# Altium PCB ExpandBoard-103-003.PcbDoc
Units mm, origin at the board's own origin, x right, y up, seen from the top; angles counter-clockwise.
Board outline 69 x 68 mm, 2 copper layers (Top Layer, Bottom Layer), stack 0.325 mm thick; 28 components, 20 nets, 53 pads, 0 vias.
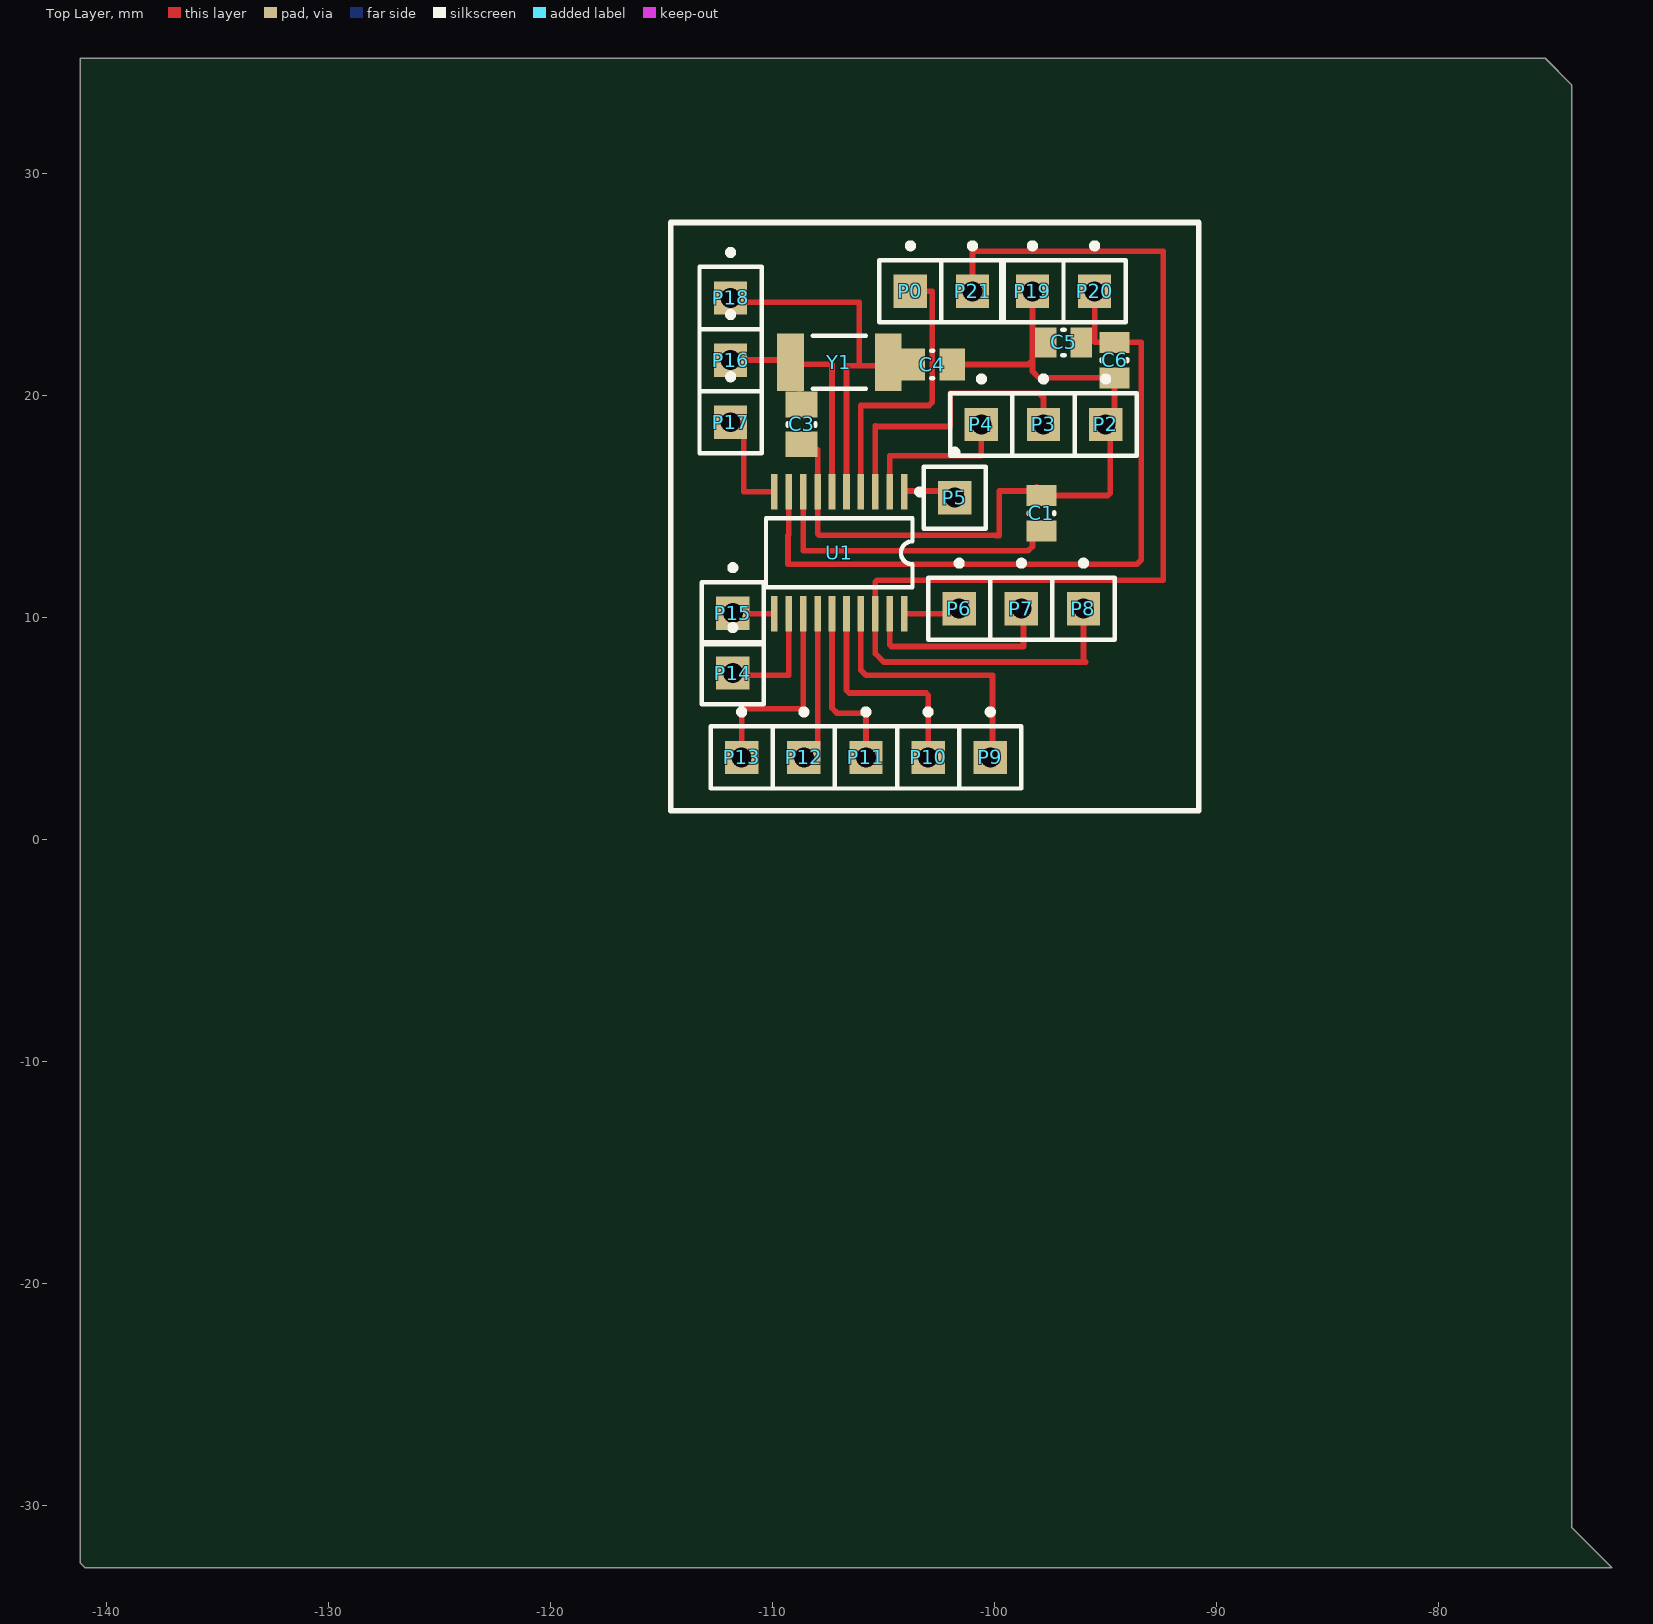
[diagram p0: Top Layer view]
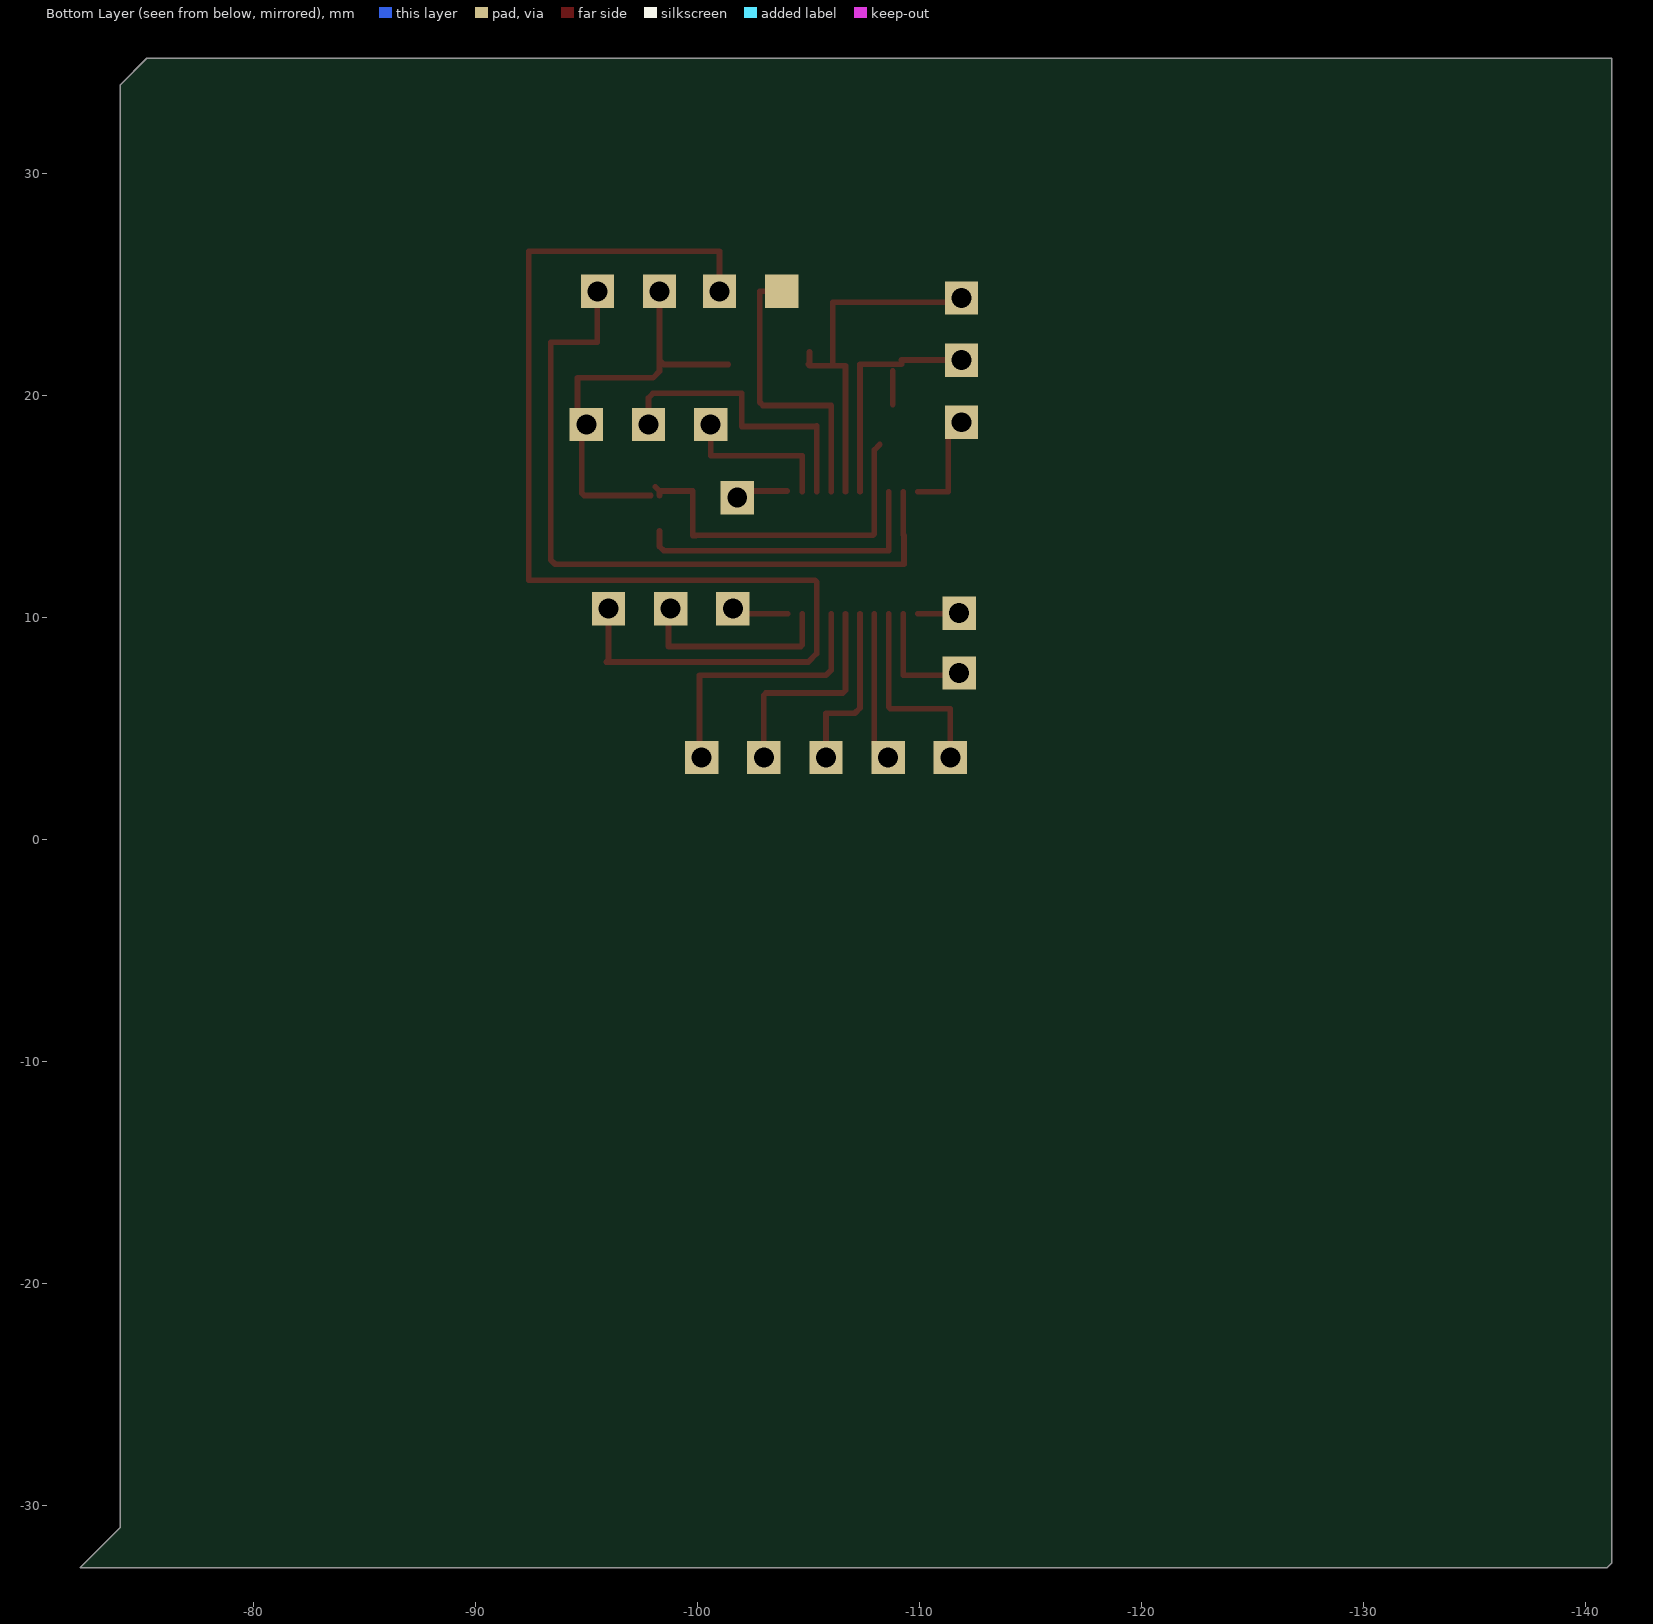
[diagram p1: Bottom Layer view, seen from below]

## Layer stack, top to bottom
Top Solder: solder mask 0.0102, Solder Resist, Dk 3.5
Top Layer: signal copper 0.0356
Dielectric 1: core 0.254, FR-4, Dk 4.2
Bottom Layer: signal copper 0.0356

## Board outline
-141,-32.8 -141.2,-32.6 -141.2,35.2 -75.2,35.2 -74,34 -74,-31 -72.2,-32.8

## Design rules (kind name [scope] priority, off if disabled: settings)
Clearance [All] p1: gap=0.254
PolygonConnect [All] p1: connectstyle=Relief reliefconductorwidth=0.254 reliefentries=4 polygonreliefangle="90 Angle" airgapwidth=0.254
RoomDefinition ExpandBoard-103-003 [InComponentClass('ExpandBoard-103-003')] p1: confinementstyle=ConfineIn formatcopy=TRUE lockcomponents=FALSE outline -137.75,-29.5 -77.9,-29.5 -77.9,30.7 -137.75,30.7
RoutingVias [All] p1: holewidth=0.711 width=1.27 viastyle="Through Hole" minholewidth=0.711 minwidth=1.27 maxholewidth=0.711 maxwidth=1.27
SolderMaskExpansion [All] p1: expansion=0.102
Width [All] p1: maxlimit=0.254 minlimit=0.254 preferedwidth=0.254
29 further rules are at their usual default settings.

## Components (designator, comment, footprint, x,y, rotation, side; value= is the part's Value field where it differs from the comment)
C1 "1mF" CAPC0805(2012)75_L -97.9,14.7 r90 top
C3 "22pF" CAPC0805(2012)75_N -108.7,18.7 r270 top
C4 "22pF" CAPC0805(2012)75_N -102.814,21.4 r0 top
C5 "10mF" CAPC0805(2012)75_L -96.9,22.4 r0 top
C6 "10nF" CAPC0805(2012)75_L -94.6,21.6 r90 top
P0 "RST" PIN1#1 -103.8,24.7 r0 top
P2 "GND" PIN1#2 -95,18.7 r0 top
P3 "RX/PD6" PIN1#2 -97.8,18.7 r0 top
P4 "TX/PD5" PIN1#2 -100.6,18.7 r0 top
P5 "PD4" PIN1#2 -101.8,15.4 r0 top
P6 "PD3" PIN1#2 -101.6,10.4 r0 top
P7 "PD2" PIN1#2 -98.8,10.4 r0 top
P8 "PD1" PIN1#2 -96,10.4 r0 top
P9 "SPI_MISO/C7" PIN1#2 -100.2,3.7 r0 top
P10 "SPI_MOSI/C6" PIN1#2 -103,3.7 r0 top
P11 "SPI_SCK/C5" PIN1#2 -105.8,3.7 r0 top
P12 "CCO/C4" PIN1#2 -108.6,3.7 r0 top
P13 "C3" PIN1#2 -111.4,3.7 r0 top
P14 "I2C_SCL/B4" PIN1#2 -111.8,7.5 r0 top
P15 "I2C_SDA/B5" PIN1#2 -111.8,10.2 r0 top
P16 "A2" PIN1#2 -111.9,21.6 r0 top
P17 "A3" PIN1#2 -111.9,18.8 r0 top
P18 "A1" PIN1#2 -111.9,24.4 r0 top
P19 "GND" PIN1#2 -98.3,24.7 r0 top
P20 "VCC" PIN1#2 -95.5,24.7 r0 top
P21 "SWIM" PIN1#2 -101,24.7 r0 top
U1 "STM8S103" TSSOP20 -107.003,12.916 r180 top
Y1 "1-25MHz" 12Z-2010 -107,21.5 r180 top

## Footprints (in the part's own frame and the unit in brackets; to place one, negate y for a bottom-side part, rotate by r counter-clockwise, add the part's x,y. Pads: shape width x height; smd on the part's side, far side on the other; paste and mask are expansions set on the pad)
12Z-2010 [mm] "Chip Resistor, Body 5.0x2.5mm, IPC High Density"
  rect 1.2x2.6 smd: 1(-2.2,0) 2(2.2,0)
  silkscreen extent -1.2,-1.2 1.2,1.2, body extent -2.58,-1.33 2.58,1.33, height 0.9
CAPC0805(2012)75_L [mm] "Chip Capacitor, Body 2.0x1.2mm, Height 0.75mm, IPC High Density"
  rect 0.95x1.35 smd: 1(-0.8,0) 2(0.8,0)
  silkscreen extent -0.05,-0.58 0.05,0.58, body extent -1.1,-0.72 1.1,0.72, height 0.75
CAPC0805(2012)75_N [mm] "Chip Capacitor, Body 2.0x1.2mm, Height 0.75mm, IPC Medium Density"
  rect 1.15x1.45 smd: 1(-0.9,0) 2(0.9,0)
  silkscreen extent -0.05,-0.62 0.05,0.63, body extent -1.1,-0.72 1.1,0.73, height 0.75
PIN1#1 [mm] "Connector; Plug"
  rect 1.5x1.5 all layers, no hole: 1(0,0)
  silkscreen extent -1.4,-1.4 1.4,2.17
PIN1#2 [mm] "Connector; Plug"
  rect 1.5x1.5 hole 0.9: 1(0,0)
  silkscreen extent -1.4,-1.4 1.4,2.17
TSSOP20 [mm] "Shrink Small Outline; 20 Leads; Body Width 4.4 mm; Pitch 0.65 mm"
  rect 0.3x1.6 smd: 1(-2.925,-2.75) 2(-2.275,-2.75) 3(-1.625,-2.75) 4(-0.975,-2.75) 5(-0.325,-2.75) 6(0.325,-2.75) 7(0.975,-2.75) 8(1.625,-2.75) 9(2.275,-2.75) 10(2.925,-2.75) 11(2.925,2.75) 12(2.275,2.75) 13(1.625,2.75) 14(0.975,2.75) 15(0.325,2.75) 16(-0.325,2.75) 17(-0.975,2.75) 18(-1.625,2.75) 19(-2.275,2.75) 20(-2.925,2.75)
  silkscreen extent -3.75,-2.87 3.3,1.55

## Part data
C1 C3 C4 C5 C6: library part CAP
P0 P2 P3 P4 P5 P6 P7 P8 P9 P10 P11 P12 P13 P14 P15 P16 P17 P18 P19 P20 P21: library part Plug, "Plug"
Y1: library part XTAL, "Crystal Oscillator"

## Nets (pads, with @x,y where several pads share a name; then routed paths per layer and width w, separated by ;. In a path a pad name is that pad's centre, name@x,y a point inside that pad or via, vN(x,y) a via of type N, cw(c..) or ccw(c..) an arc to the next point about the centre after c; other vN are vias at no path point)
GND: C1.2 C3.2 C4.2 C5.1 C6.1 P2.1 P19.1 U1.7 | length 35.3
  Top Layer w0.254: C3.2@-108.22,17.8 -107.978,17.558 U1.7 -107.978,13.778 -107.916,13.716 -99.942,13.716 -99.926,13.7 -99.8,13.7 -99.8,15.7 C1.2@-98.3,15.7 ; C4.2@-101.4,21.4 -98.5,21.4 -98.3,21.6 ; C1.2@-98.3,15.5 C1.2@-98.3,15.7 ; P19.1 -98.3,21.6 ; C1.2@-98.1,15.9 C1.2@-98.3,15.7 ; C1.2 -94.9,15.5 -94.8,15.6 -94.8,18.9 -94.6,19.1 C6.1 -98,20.8 -98.3,21.1 -98.3,21.6
NetC1_1: C1.1 U1.8 | length 13.8
  Top Layer w0.254: U1.8 -108.628,13.014 -99.959,13.014 -98.486,13.014 -98.3,13.2 C1.1@-98.3,13.9
NetC3_1: C3.1 P16.1 U1.6 Y1.2 | length 11.2
  Top Layer w0.254: P16.1@-111.3,21.608 Y1.2@-109.2,21.608 ; Y1.2@-109.2,21.409 -107.328,21.409 U1.6 ; C3.1@-108.8,19.6 Y1.2@-108.8,21.108
NetC4_1: C4.1 P18.1 U1.5 Y1.1 | length 16
  Top Layer w0.254: P18.1@-111.3,24.2 -106.1,24.2 -106.1,21.353 ; U1.5 -106.678,21.353 -106.1,21.353 ; Y1.1@-105.055,21.963 -105.055,21.353 -106.1,21.353 ; Y1.1@-105,21.41 Y1.1@-104.999,21.409
NetP0_1: P0.1 U1.4 | length 13.2
  Top Layer w0.254: U1.4 -106.028,19.558 -102.956,19.558 -102.814,19.7 -102.814,24.7 P0.1
NetP3_1: P3.1 U1.3 | length 13.3
  Top Layer w0.254: U1.3 -105.378,18.636 ; -105.348,18.606 -102,18.606 -102,20.1 -98,20.1 -97.8,19.9 P3.1
NetP4_1: P4.1 U1.2 | length 7.4
  Top Layer w0.254: U1.2 -104.728,17.286 -100.6,17.286 -100.6,18.2 P4.1@-101.1,18.7
NetP5_1: P5.1 U1.1 | length 1.7
  Top Layer w0.254: U1.1@-104.044,15.7 P5.1@-102.3,15.7
NetP6_1: P6.1 U1.20 | length 2.2
  Top Layer w0.254: U1.20 P6.1@-101.834,10.166
NetP7_1: P7.1 U1.19 | length 9.1
  Top Layer w0.254: U1.19 -104.728,8.772 -104.656,8.7 -98.7,8.7 P7.1@-98.7,10.3
NetP8_1: P8.1 P21.1 U1.18 | length 53.7
  Top Layer w0.254: P21.1@-101.3,24.7 -101,25 -101,26.5 -92.4,26.5 -92.4,11.684 -105.3,11.684 -105.378,11.606 U1.18 -105.378,8.378 -105,8 -95.9,8 -96,8.1 P8.1
NetP9_1: P9.1 U1.17 | length 12.2
  Top Layer w0.254: U1.17 -106.028,7.628 -105.8,7.4 -100.1,7.4 P9.1@-100.1,3.8
NetP10_1: P10.1 U1.16 | length 10
  Top Layer w0.254: U1.16 -106.678,6.722 -106.556,6.6 -103.092,6.6 -103,6.508 P10.1
NetP11_1: P11.1 U1.15 | length 7.9
  Top Layer w0.254: U1.15 -107.328,5.928 -107.092,5.692 -105.8,5.692 P11.1
NetP12_1: P12.1 U1.14 | length 6.7
  Top Layer w0.254: P12.1 -107.978,4.322 U1.14
NetP13_1: P13.1 U1.13 | length 9.2
  Top Layer w0.254: P13.1 -111.4,5.9 -108.7,5.9 -108.628,5.972 U1.13
NetP14_1: P14.1 U1.12 | length 5.3
  Top Layer w0.254: P14.1@-111.8,7.4 -109.278,7.4 U1.12
NetP15_1: P15.1 U1.11 | length 1.5
  Top Layer w0.254: P15.1@-111.472,10.166 U1.11
NetP17_1: P17.1 U1.10 | length 4.3
  Top Layer w0.254: P17.1@-111.3,18.6 -111.3,15.666 U1.10
VCC: C5.2 C6.2 P20.1 U1.9 | length 33.5
  Top Layer w0.254: U1.9 -109.278,13.736 -109.314,13.7 -109.314,12.4 -93.6,12.4 -93.4,12.6 -93.4,22.4 C6.2 -95.5,22.4 P20.1
copper on no net: | length 913
  Bottom Layer w0.254: -177.2,-128 76.4,-128 76.4,74.9 -177.2,74.9 -177.2,-128

## Silkscreen, mask and mechanical layers (free items; w line width, h text height)
Top Overlay:
  lines w0.254: -114.6,1.3 -90.8,1.3 -90.8,27.8 -114.6,27.8 -114.6,1.3

## Dimensions
-90.8,1.3 to -114.6,1.4 on Top Overlay
-114.6,1.3 to -114.6,27.8 on Top Overlay